# Altium PCB BackDrill.PcbDoc
Units mil, origin at the board's own origin, x right, y up, seen from the top; angles counter-clockwise.
Board outline 3600 x 1510 mil, 10 copper layers (Component Side, Ground Plane 1 (GND), Inner Layer 1, Power Plane 2 (VCC), Inner Layer 2, Inner Layer 3, Ground Plane 2 (+12V), Inner Layer 4, Ground Plane 2 (GND), Solder Side), stack 84.136 mil thick; 18 components, 24 nets, 48 pads, 40 vias.
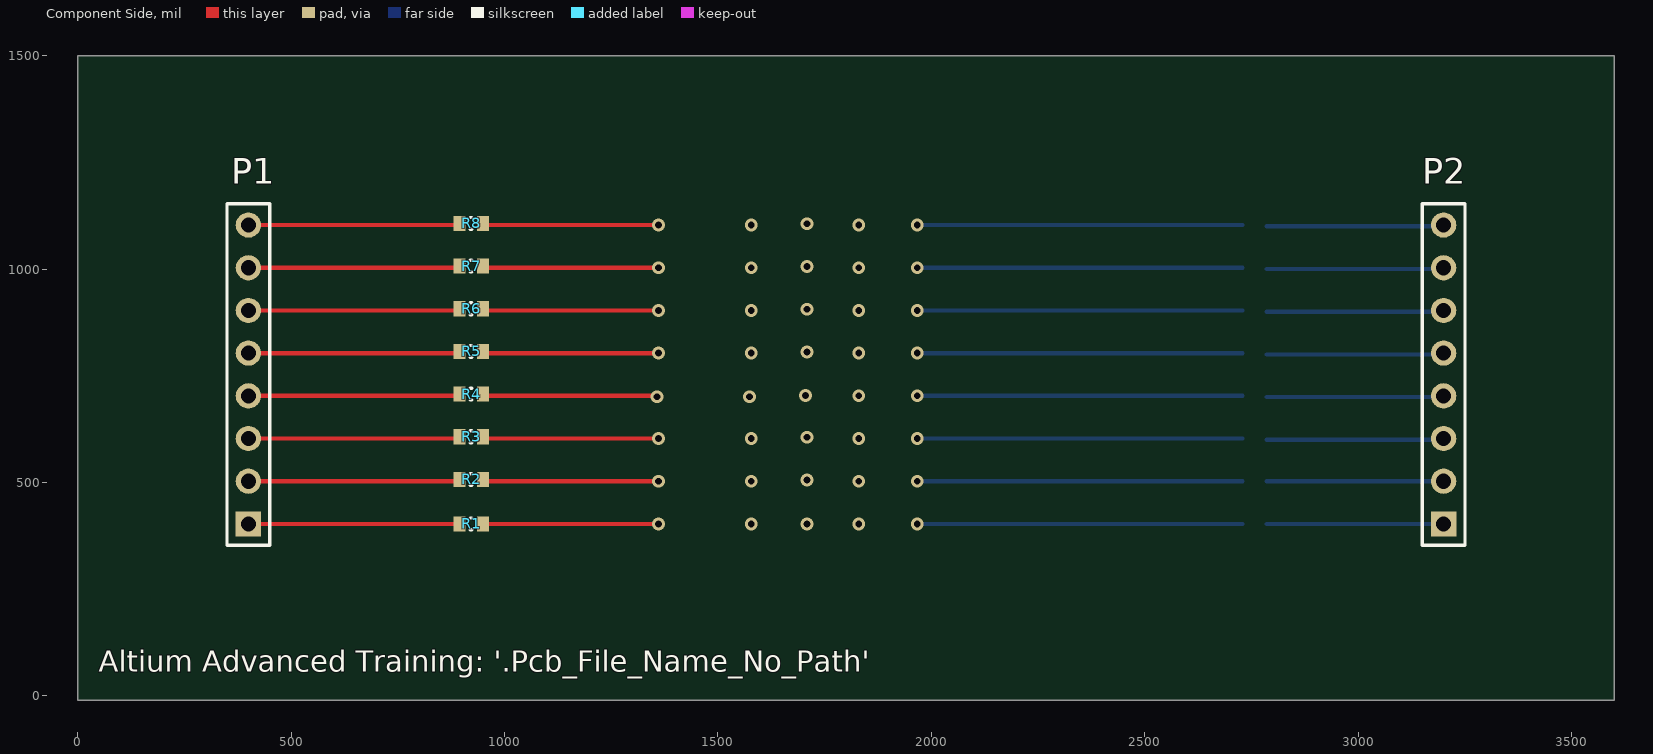
[diagram p0: Component Side view]
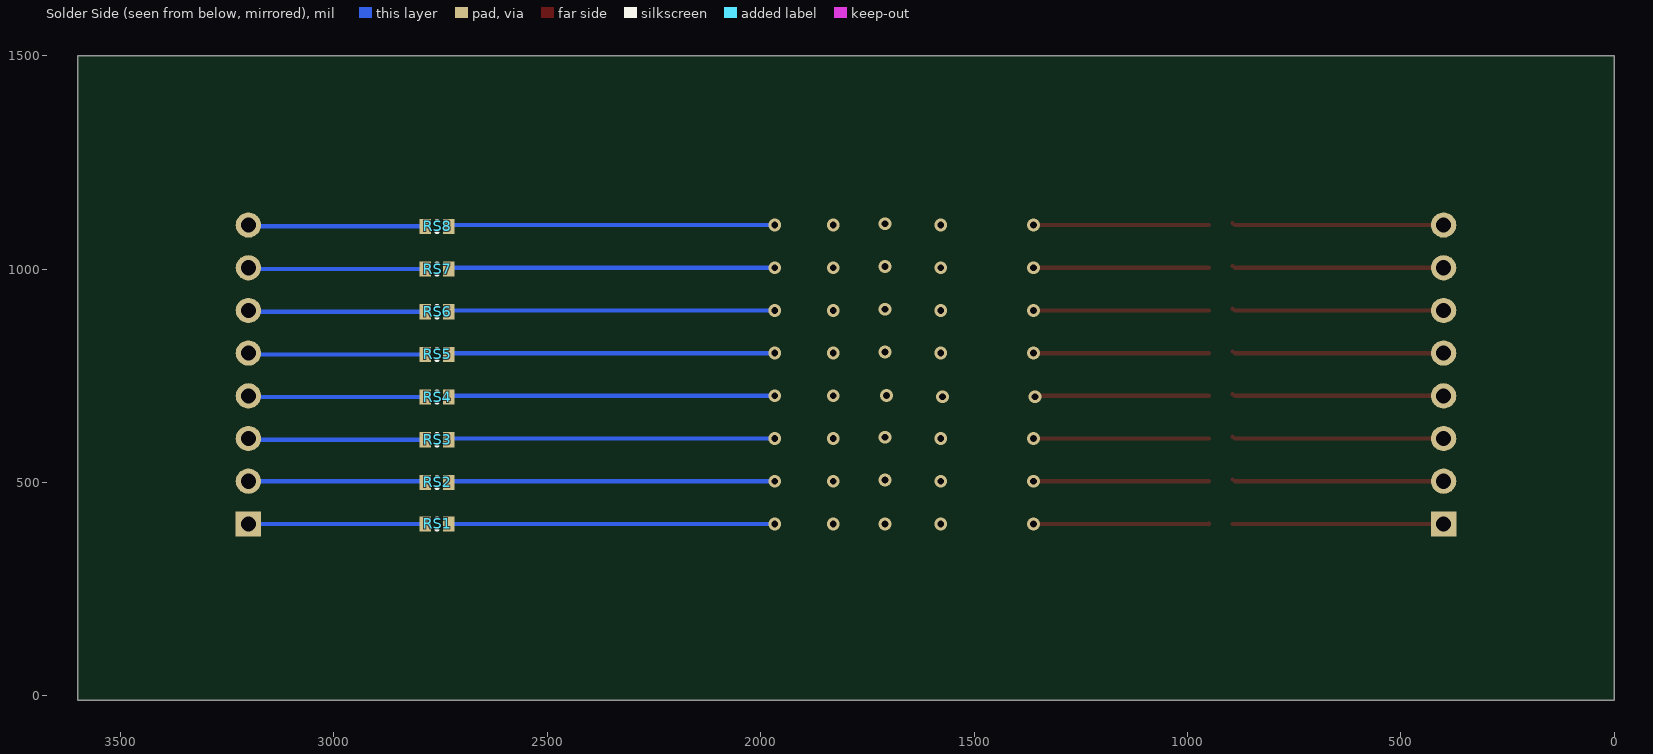
[diagram p1: Solder Side view, seen from below]
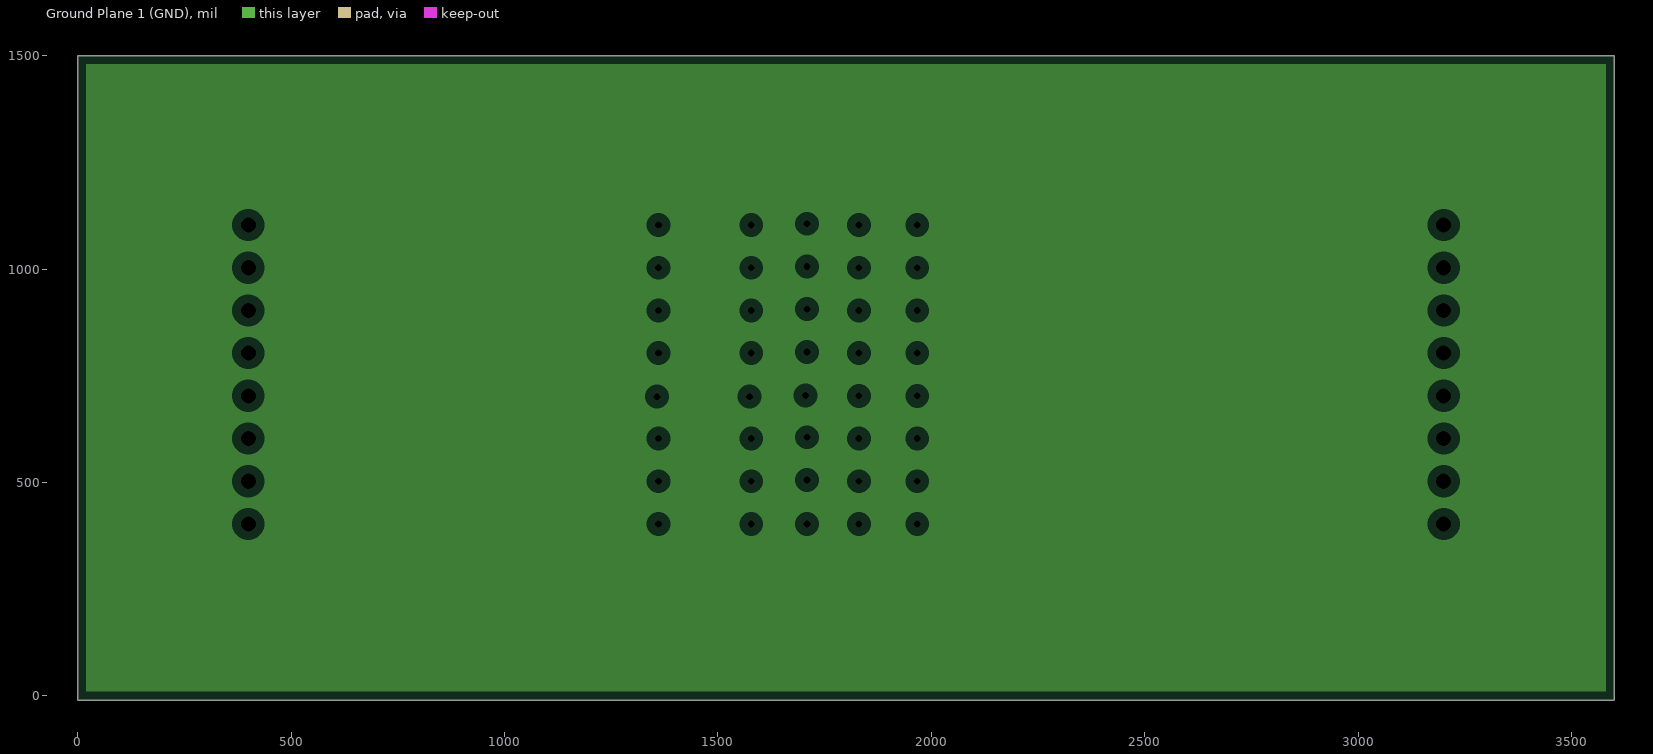
[diagram p2: Ground Plane 1 (GND), clearances drawn from the general rule]
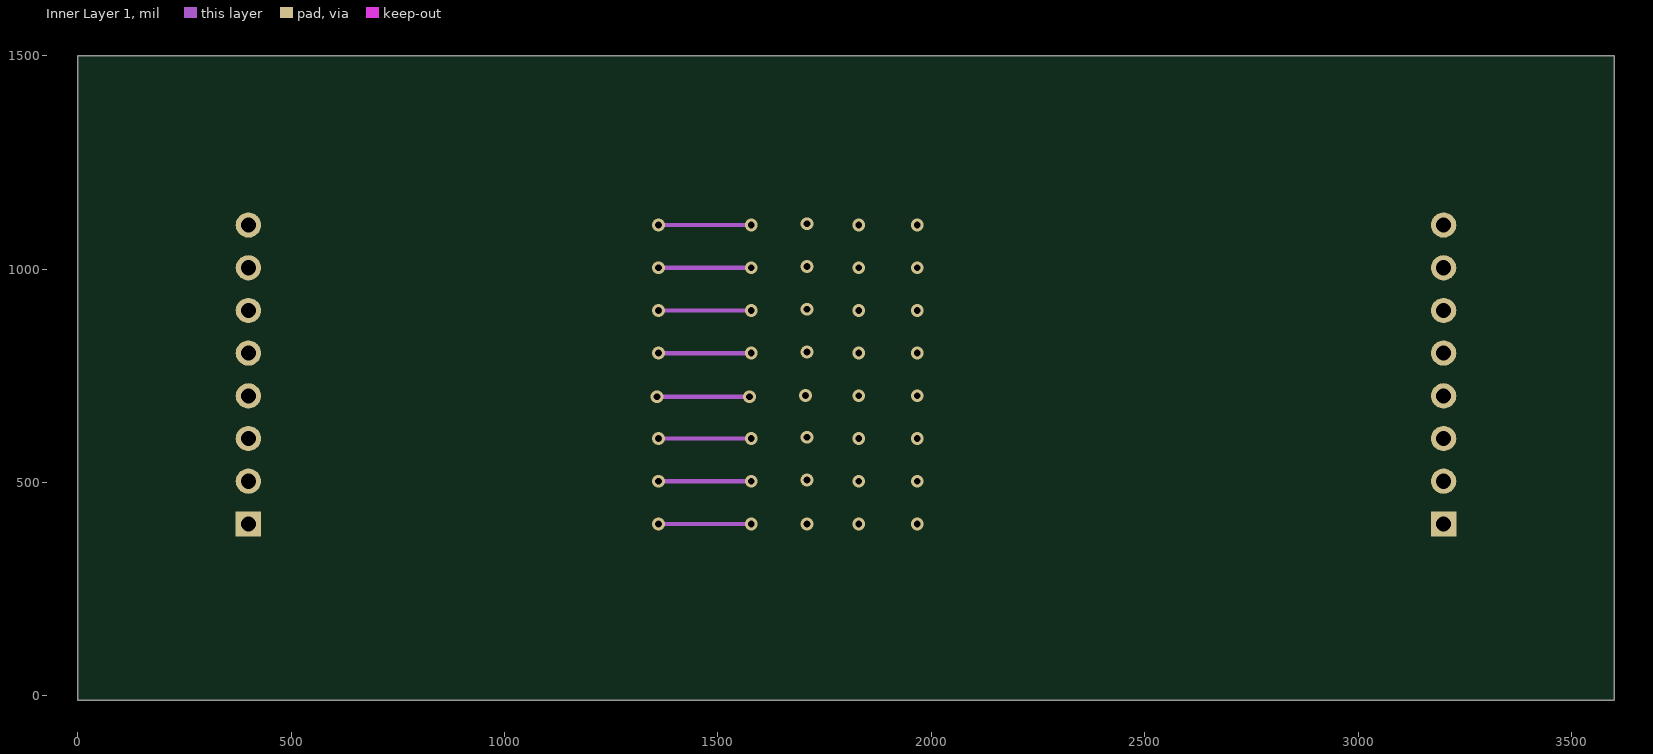
[diagram p3: Inner Layer 1]
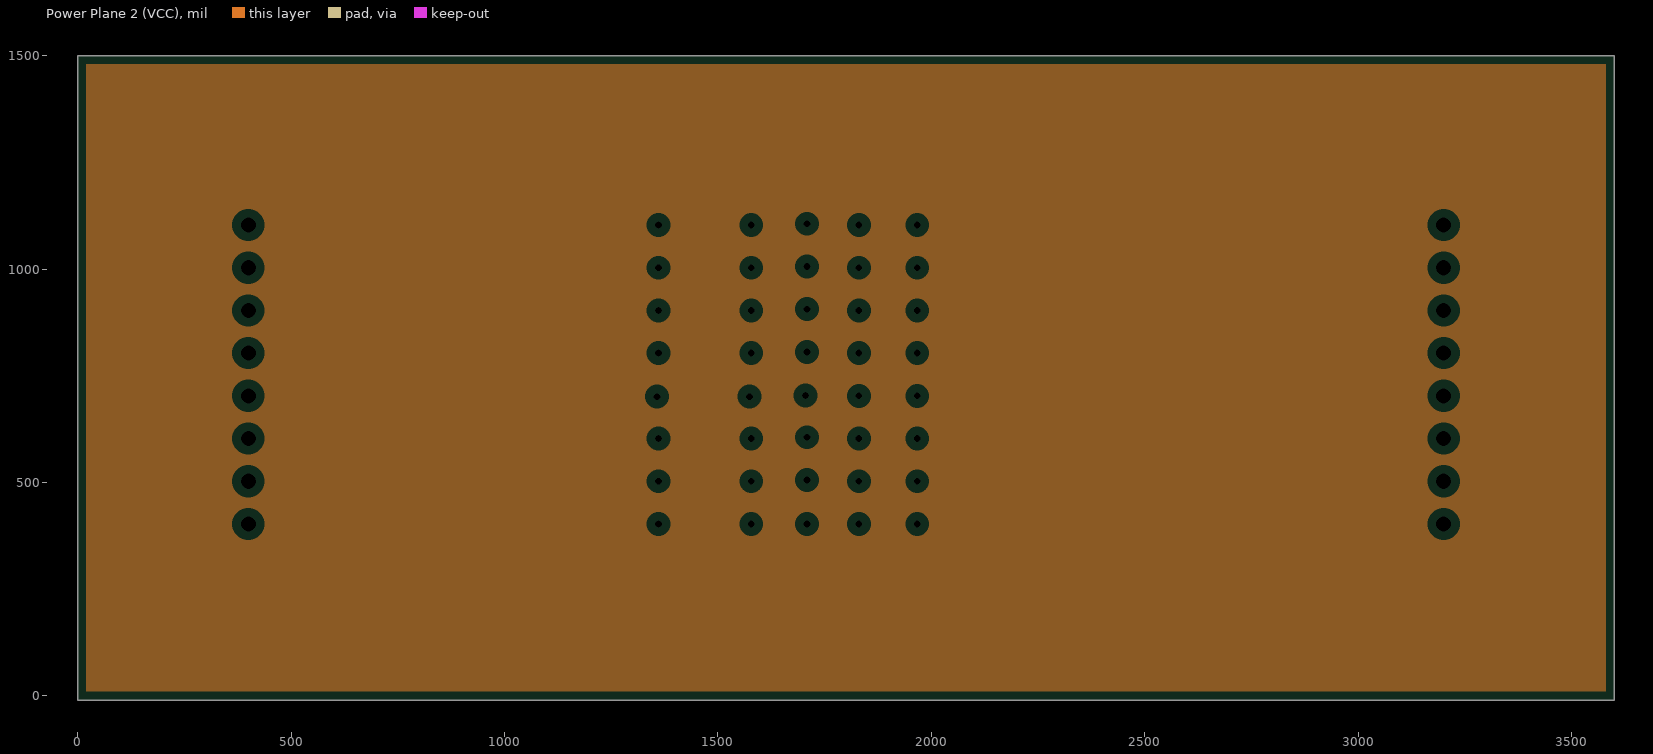
[diagram p4: Power Plane 2 (VCC), clearances drawn from the general rule]
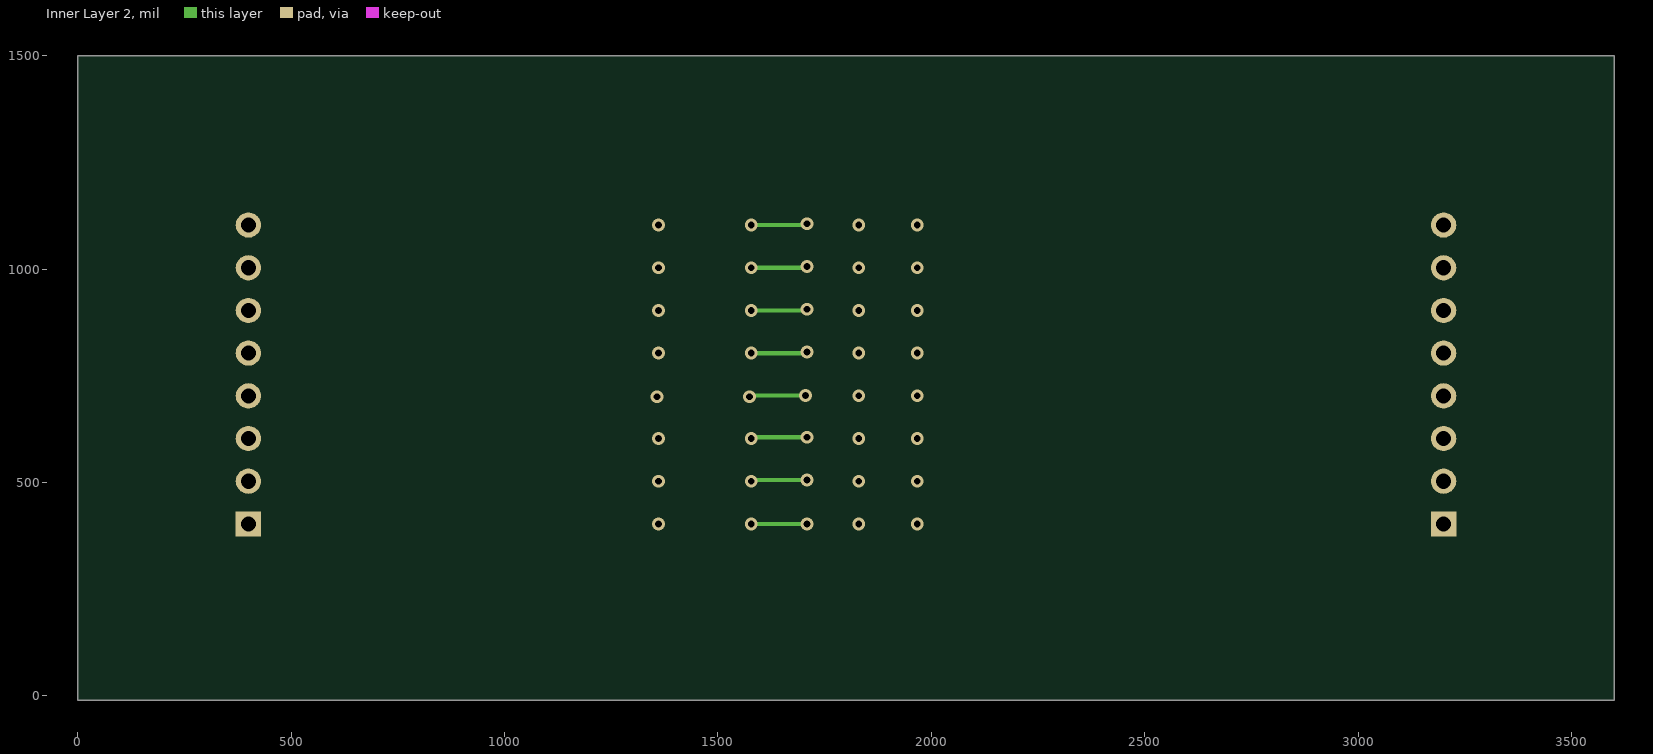
[diagram p5: Inner Layer 2]
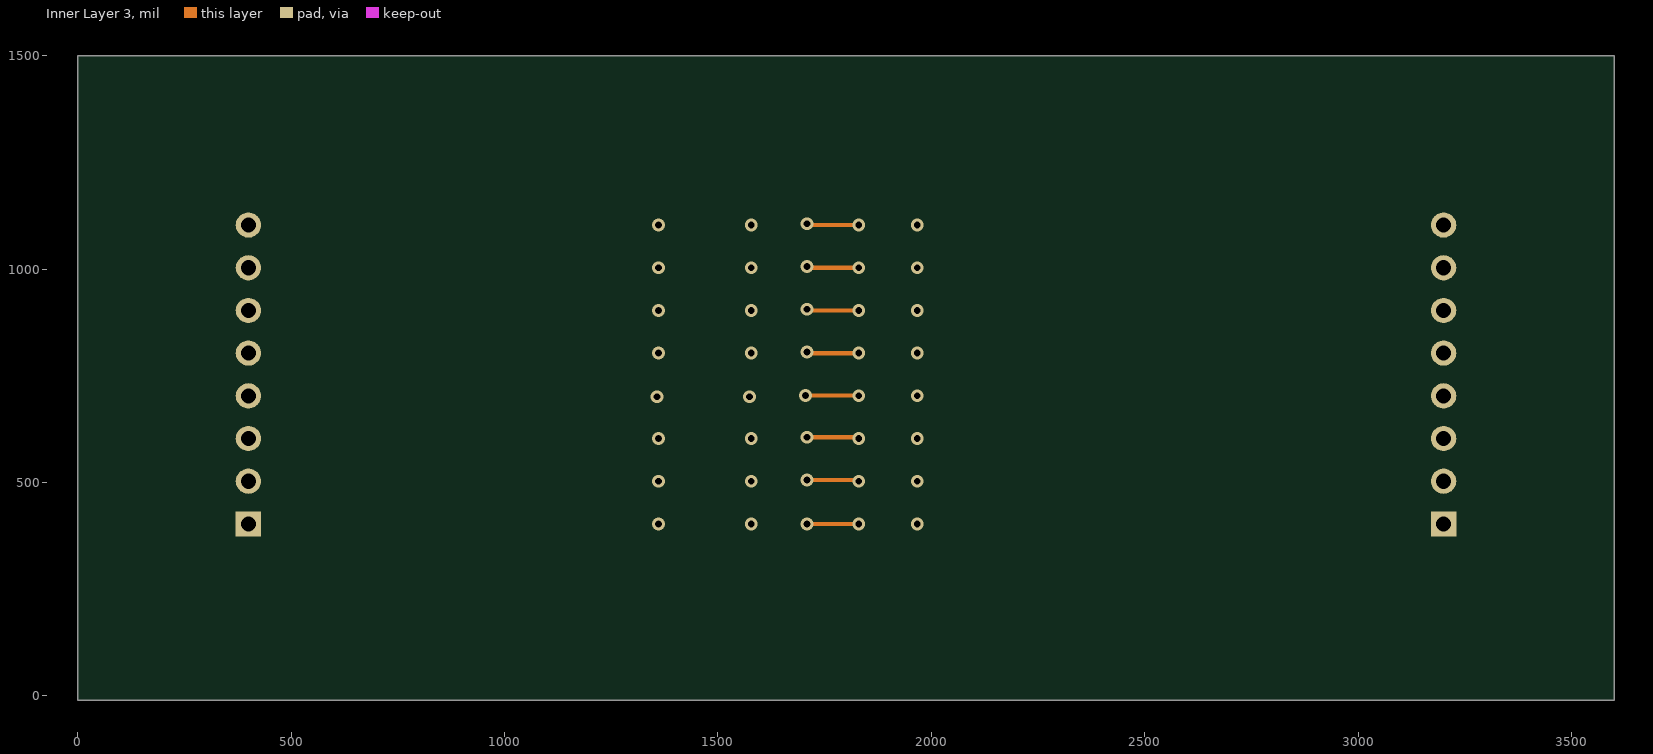
[diagram p6: Inner Layer 3]
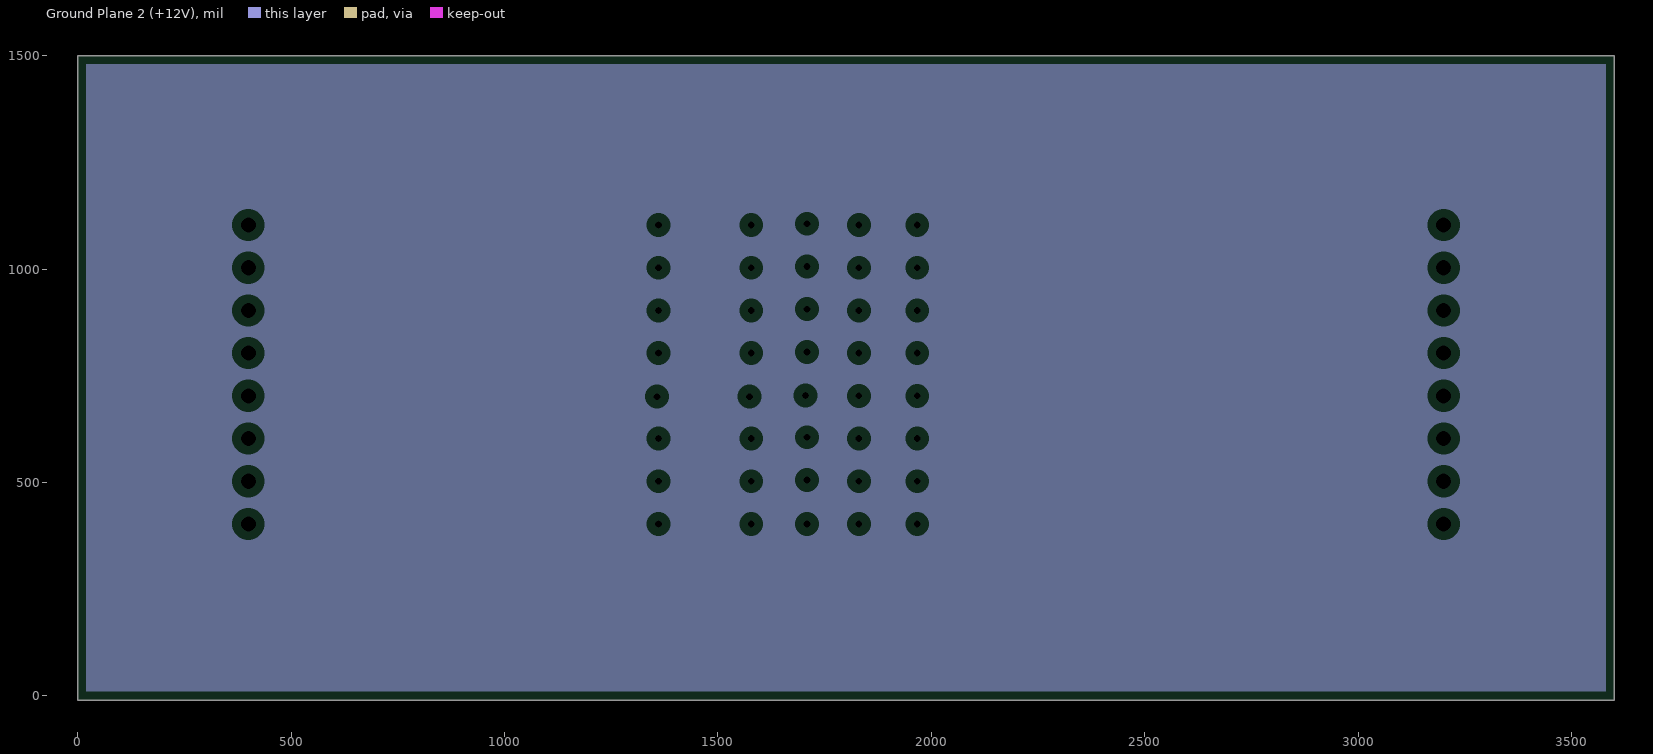
[diagram p7: Ground Plane 2 (+12V), clearances drawn from the general rule]
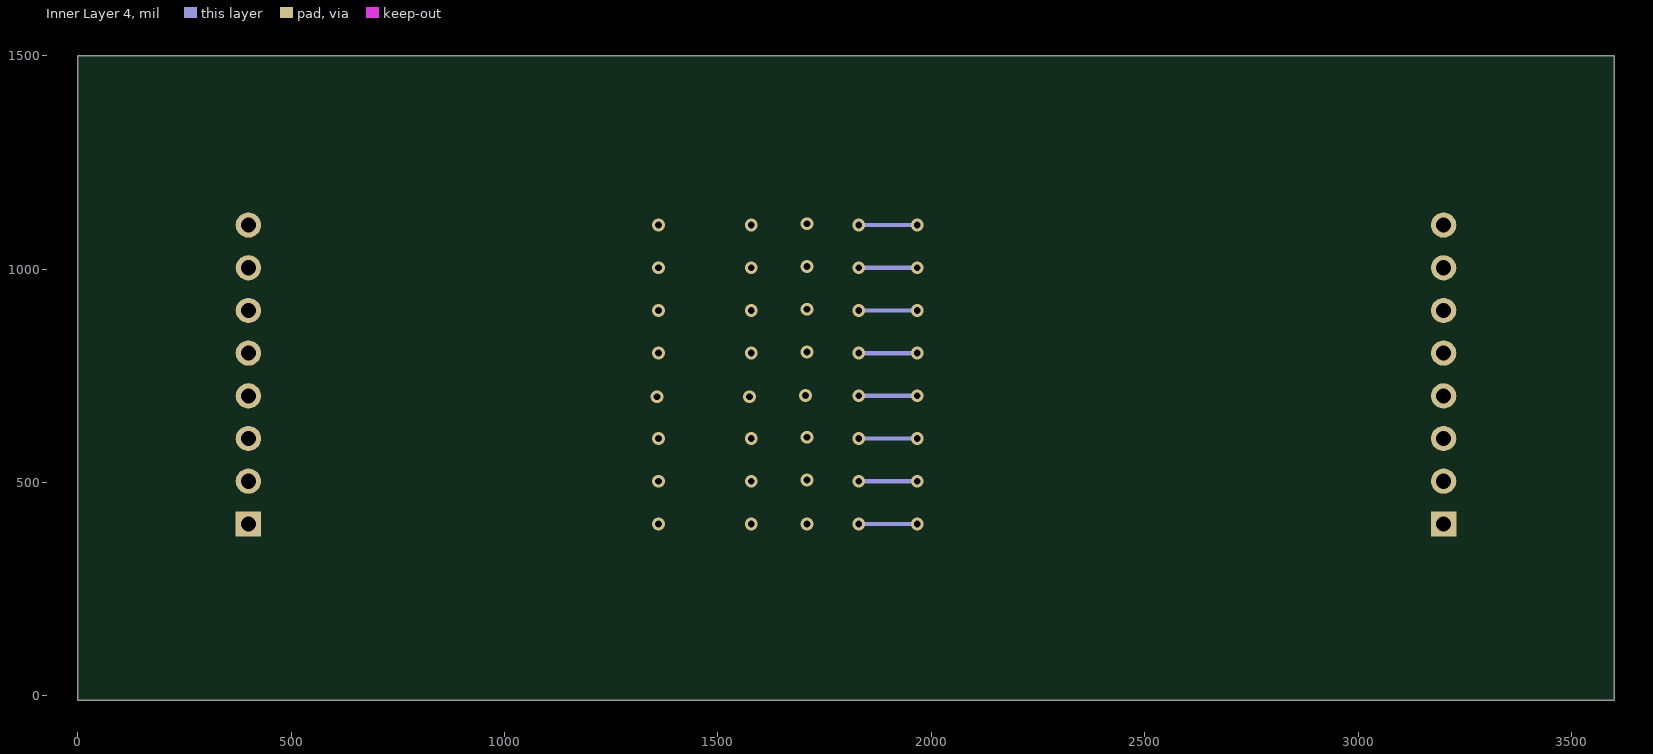
[diagram p8: Inner Layer 4]
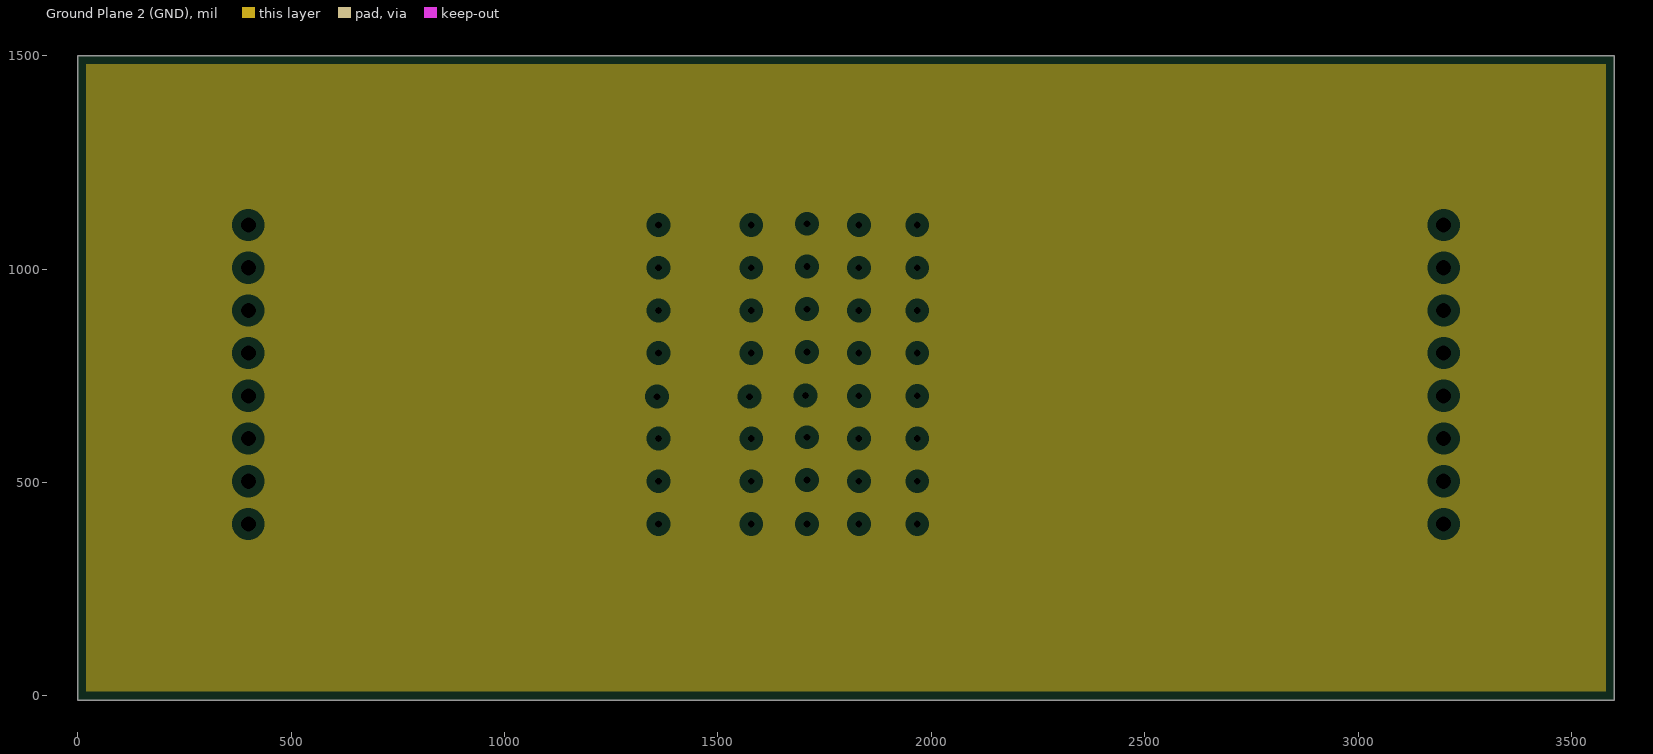
[diagram p9: Ground Plane 2 (GND), clearances drawn from the general rule]

## Layer stack, top to bottom
Top Solder: solder mask 0.4, Solder Resist, Dk 3.5
Component Side: signal copper 1.4
Dielectric 1: core 10, Core-028, Dk 4.3
Ground Plane 1 (GND): plane copper 1.417
Dielectric 3: prepreg 5, Dk 4.2
Inner Layer 1: signal copper 1.417
Dielectric 9: core 10, Core-028, Dk 4.3
Power Plane 2 (VCC): plane copper 1.417
Dielectric 6: prepreg 5, Dk 4.2
Inner Layer 2: signal copper 1.417
Dielectric 10: core 10, Core-028, Dk 4.3
Inner Layer 3: signal copper 1.417
Dielectric 11: prepreg 5, Dk 4.2
Ground Plane 2 (+12V): plane copper 1.417
Dielectric 5: core 10, Core-028, Dk 4.3
Inner Layer 4: signal copper 1.417
Dielectric 7: prepreg 5, Dk 4.2
Ground Plane 2 (GND): plane copper 1.417
Dielectric 8: core 10, Core-028, Dk 4.3
Solder Side: signal copper 1.4
Bottom Solder: solder mask 0.4, Solder Resist, Dk 3.5

## Board outline
0,-10 3600,-10 3600,1500 0,1500

## Design rules (kind name [scope] priority, off if disabled: settings)
BackDrilling [InNetClass('HSdata') and IsVia] p1: maxstublength=9 usetopbackdrill=TRUE usebottombackdrill=TRUE holeoversize=1 holetolplus=0 holetolminus=0
Clearance [All] p1: gap=10 ignorepadtopadclearanceinfootprint=FALSE except(0: Arc-Hole Track-Hole SMDPad-Hole THPad-Hole Via-Hole Fill-Hole Poly-Hole Region-Hole Text-Hole)
PlaneClearance [All] p1: clearance=20
PlaneConnect [All] p1: planeconnectstyle=Relief reliefexpansion=20 reliefentries=4 reliefconductorwidth=10 reliefairgap=10
PolygonConnect [All] p1: connectstyle=Relief reliefconductorwidth=10 reliefentries=4 polygonreliefangle="90 Angle" airgapwidth=10
RoutingVias [All] p1: holewidth=28 width=50 viastyle="Through Hole" minholewidth=12 minwidth=25 maxholewidth=28 maxwidth=50
SolderMaskExpansion [All] p1: expansion=4 istentingtop=FALSE
Width [All] p1: maxlimit=10 minlimit=10 preferedwidth=10
28 further rules are at their usual default settings.

## Classes and differential pairs
net class HSdata: Data1 Data2 Data3 Data4 Data5 Data6 Data7 Data8 Din1 Din2 Din3 Din4 Din5 Din6 Din7 Din8 Dot1 Dot2 Dot3 Dot4 Dot5 Dot6 Dot7 Dot8

## Components (designator, comment, footprint, x,y, rotation, side; value= is the part's Value field where it differs from the comment)
P1 "Header 8" HDR1X8 400,403 r90 top
P2 "Header 8" HDR1X8 3200,403 r90 top
R1 "1K 0603" 0603_L 922,403 r0 top
R2 "1K 0603" 0603_L 922,507 r0 top
R3 "1K 0603" 0603_L 922,607 r0 top
R4 "1K 0603" 0603_L 922,707 r0 top
R5 "1K 0603" 0603_L 922,807 r0 top
R6 "1K 0603" 0603_L 922,907 r0 top
R7 "1K 0603" 0603_L 922,1007 r0 top
R8 "1K 0603" 0603_L 922,1107 r0 top
RS1 "1K 0603" 0603_L 2758,403 r0 bottom
RS2 "1K 0603" 0603_L 2758,500 r0 bottom
RS3 "1K 0603" 0603_L 2758,600 r0 bottom
RS4 "1K 0603" 0603_L 2758,700 r0 bottom
RS5 "1K 0603" 0603_L 2758,800 r0 bottom
RS6 "1K 0603" 0603_L 2758,900 r0 bottom
RS7 "1K 0603" 0603_L 2758,1000 r0 bottom
RS8 "1K 0603" 0603_L 2758,1100 r0 bottom

## Footprints (in the part's own frame and the unit in brackets; to place one, negate y for a bottom-side part, rotate by r counter-clockwise, add the part's x,y. Pads: shape width x height; smd on the part's side, far side on the other; paste and mask are expansions set on the pad)
0603_L [mm]
  rect 0.7x0.9 smd: 1(-0.7,0) 2(0.7,0)
  silkscreen extent -0.05,-0.35 0.05,0.35, body extent -0.85,-0.47 0.85,0.47, height 0.6
HDR1X8 [mm] "Connector; Header; 8 Position"
  rect 1.5x1.5 hole 0.9: 1(0,0)
  round 1.5 hole 0.9: 2(2.54,0) 3(5.08,0) 4(7.62,0) 5(10.16,0) 6(12.7,0) 7(15.24,0) 8(17.78,0)
  silkscreen extent -1.27,-1.27 19.05,1.27

## Part data
P1 P2: "Header, 8-Pin", LatestRevisionDate=17-Jul-2002, LatestRevisionNote="Re-released for DXP Platform.", Publisher="Altium Limited"
R1 R2 R3 R4 R5 R6 R7 R8 RS1 RS2 RS3 RS4 RS5 RS6 RS7 RS8: library part Res1K_0603, Manufacturer="Panasonic Electronic Components", Manufacturer Part Number=ERJ-3GEYJ102V, Operating Temperature="-55°C ~ 155°C", Package / Case="0603 (1608 Metric)", Power (Watts)="0.1W, 1/10W", Resistance (Ohms)=1k, Supplier Device Package=0603, Supplier Part Number 1=P1.0KGCT-ND, Temperature Coefficient=±200ppm/°C, Tolerance=±5%, Category=Resistors, ComponentLink1Description=http://industrial.panasonic.com/www-cgi/jvcr13pz.cgi?E+PZ+3+AOA0001+ERJ3GEYJ102V+7+WW, ComponentLink1URL=http://industrial.panasonic.com/www-cgi/jvcr13pz.cgi?E+PZ+3+AOA0001+ERJ3GEYJ102V+7+WW, Composition="Thick Film", Failure Rate=-, Features="Automotive AEC-Q200", Height="0.022\" (0.55mm)", Number of Terminations=2, Packaging="Cut Tape (CT)", Part Status=Active, Pricing 1="1=0.1, 50=0.0096, 100=0.0071, 250=0.00544, 500=0.00436, 1000=0.00321 (USD)", RoHS="RoHS Compliant", Size / Dimension="0.063\" L x 0.031\" W (1.60mm x 0.80mm)", Stock 1=1335381, Supplier 1=Digi-Key

## Via types
v1: diameter 30, hole 16, Component Side to Solder Side, 40 vias

## Nets (pads, with @x,y where several pads share a name; then routed paths per layer and width w, separated by ;. In a path a pad name is that pad's centre, name@x,y a point inside that pad or via, vN(x,y) a via of type N, cw(c..) or ccw(c..) an arc to the next point about the centre after c; other vN are vias at no path point)
Data1: P1.1 R1.1 | length 489
  Component Side w10: P1.1 R1.1@889,403
Data2: P1.2 R2.1 | length 489
  Component Side w10: P1.2 R2.1@889,503
Data3: P1.3 R3.1 | length 489
  Component Side w10: P1.3 R3.1@889,603
Data4: P1.4 R4.1 | length 489
  Component Side w10: P1.4 R4.1@889,703
Data5: P1.5 R5.1 | length 489
  Component Side w10: P1.5 R5.1@889,803
Data6: P1.6 R6.1 | length 489
  Component Side w10: P1.6 R6.1@889,903
Data7: P1.7 R7.1 | length 489
  Component Side w10: P1.7 R7.1@889,1003
Data8: P1.8 R8.1 | length 489
  Component Side w10: P1.8 R8.1@889,1103
Din1: R1.2 RS1.1 | length 1783.5
  Component Side w10: R1.2@949.56,404 R1.2@951.56,402 ; R1.2@950,403 v1(1361,403)
  Inner Layer 1 w10: v1(1361,403) v1(1578,403)
  Inner Layer 2 w10: v1@1578,401.5 v1@1581,404.5 ; v1@1581,403 v1(1709,403)
  Inner Layer 3 w10: v1(1709,403) v1@1829,403 ; v1@1829,403.5 v1@1830,402.5
  Inner Layer 4 w10: v1(1830,403) v1(1967,403)
  Solder Side w10: v1(1967,403) RS1.1@2729,403
Din2: R2.2 RS2.1 | length 1781.5
  Component Side w10: R2.2@950,503 v1(1361,503)
  Inner Layer 1 w10: v1(1361,503) v1(1578,503)
  Inner Layer 2 w10: v1(1578,503) 1581,506 v1(1709,506)
  Inner Layer 3 w10: v1(1709,506) 1827,506 v1(1830,503)
  Inner Layer 4 w10: v1(1830,503) v1(1967,503)
  Solder Side w10: v1(1967,503) RS2.1@2729,503
Din3: R3.2 RS3.1 | length 1781.5
  Component Side w10: R3.2@950,603 v1(1361,603)
  Inner Layer 1 w10: v1(1361,603) v1(1578,603)
  Inner Layer 2 w10: v1(1578,603) 1581,606 v1(1709,606)
  Inner Layer 3 w10: v1(1709,606) 1827,606 v1(1830,603)
  Inner Layer 4 w10: v1(1830,603) v1(1967,603)
  Solder Side w10: v1(1967,603) RS3.1@2729,603
Din4: R4.2 RS4.1 | length 1788.7
  Component Side w10: R4.2@950,703 v1@1361,703
  Inner Layer 1 w10: v1(1357,701) v1(1574,701) v1@1578,701
  Inner Layer 2 w10: v1(1574,701) 1577,704 v1(1705,704)
  Inner Layer 3 w10: v1(1705,704) 1829,704 v1(1830,703)
  Inner Layer 4 w10: v1(1830,703) v1(1967,703)
  Solder Side w10: v1(1967,703) RS4.1@2729,703
Din5: R5.2 RS5.1 | length 1781.5
  Component Side w10: R5.2@950,803 v1(1361,803)
  Inner Layer 1 w10: v1(1361,803) v1(1578,803)
  Inner Layer 2 w10: v1(1578,803) 1706,803 v1(1709,806)
  Inner Layer 3 w10: v1(1709,806) 1712,803 v1(1830,803)
  Inner Layer 4 w10: v1(1830,803) v1(1967,803)
  Solder Side w10: v1(1967,803) RS5.1@2729,803
Din6: R6.2 RS6.1 | length 1781.5
  Component Side w10: R6.2@950,903 v1(1361,903)
  Inner Layer 1 w10: v1(1361,903) v1(1578,903)
  Inner Layer 2 w10: v1(1578,903) 1706,903 v1(1709,906)
  Inner Layer 3 w10: v1(1709,906) 1712,903 v1(1830,903)
  Inner Layer 4 w10: v1(1830,903) v1(1967,903)
  Solder Side w10: v1(1967,903) RS6.1@2729,903
Din7: R7.2 RS7.1 | length 1781.5
  Component Side w10: R7.2@950,1003 v1(1361,1003)
  Inner Layer 1 w10: v1(1361,1003) v1(1578,1003)
  Inner Layer 2 w10: v1(1578,1003) 1706,1003 v1(1709,1006)
  Inner Layer 3 w10: v1(1709,1006) 1712,1003 v1(1830,1003)
  Inner Layer 4 w10: v1(1830,1003) v1(1967,1003)
  Solder Side w10: v1(1967,1003) RS7.1@2729,1003
Din8: R8.2 RS8.1 | length 1781.5
  Component Side w10: R8.2@950,1103 1277.06,1103 v1(1361,1103)
  Inner Layer 1 w10: v1(1361,1103) v1(1578,1103)
  Inner Layer 2 w10: v1(1578,1103) 1706,1103 v1(1709,1106)
  Inner Layer 3 w10: v1(1709,1106) 1712,1103 v1(1830,1103)
  Inner Layer 4 w10: v1(1830,1103) v1(1967,1103)
  Solder Side w10: v1(1967,1103) RS8.1@2729,1103
Dot1: P2.1 RS1.2 | length 414.4
  Solder Side w10: RS1.2 P2.1
Dot2: P2.2 RS2.2 | length 414.4
  Solder Side w10: RS2.2@2785.56,503 P2.2
Dot3: P2.3 RS3.2 | length 415.7
  Solder Side w10: RS3.2 3197,600 P2.3
Dot4: P2.4 RS4.2 | length 415.7
  Solder Side w10: RS4.2 3197,700 P2.4
Dot5: P2.5 RS5.2 | length 415.7
  Solder Side w10: RS5.2 3197,800 P2.5
Dot6: P2.6 RS6.2 | length 415.7
  Solder Side w10: RS6.2 3197,900 P2.6
Dot7: P2.7 RS7.2 | length 415.7
  Solder Side w10: RS7.2 3197,1000 P2.7
Dot8: P2.8 RS8.2 | length 415.7
  Solder Side w10: RS8.2 3197,1100 P2.8

## Polygon pours and split planes (outlines as drawn)
no net on Ground Plane 1 (GND) (split plane): 3579.9,10.1 20.1,10.1 20.1,1479.9 3579.9,1479.9
no net on Power Plane 2 (VCC) (split plane): 3579.9,10.1 20.1,10.1 20.1,1479.9 3579.9,1479.9
no net on Ground Plane 2 (+12V) (split plane): 3579.9,10.1 20.1,10.1 20.1,1479.9 3579.9,1479.9
no net on Ground Plane 2 (GND) (split plane): 3579.9,10.1 20.1,10.1 20.1,1479.9 3579.9,1479.9

## Silkscreen, mask and mechanical layers (free items; w line width, h text height)
Top Overlay:
  text "Altium Advanced Training: '.Pcb_File_Name_No_Path'" at 50,56.66 h50